# Altium PCB PCB1规则OK.PcbDoc
Units mil, origin at the board's own origin, x right, y up, seen from the top; angles counter-clockwise.
Board outline 5905.51 x 5905.51 mil, 2 copper layers (Top Layer, Bottom Layer); 93 components, 93 nets, 298 pads, 41 vias.
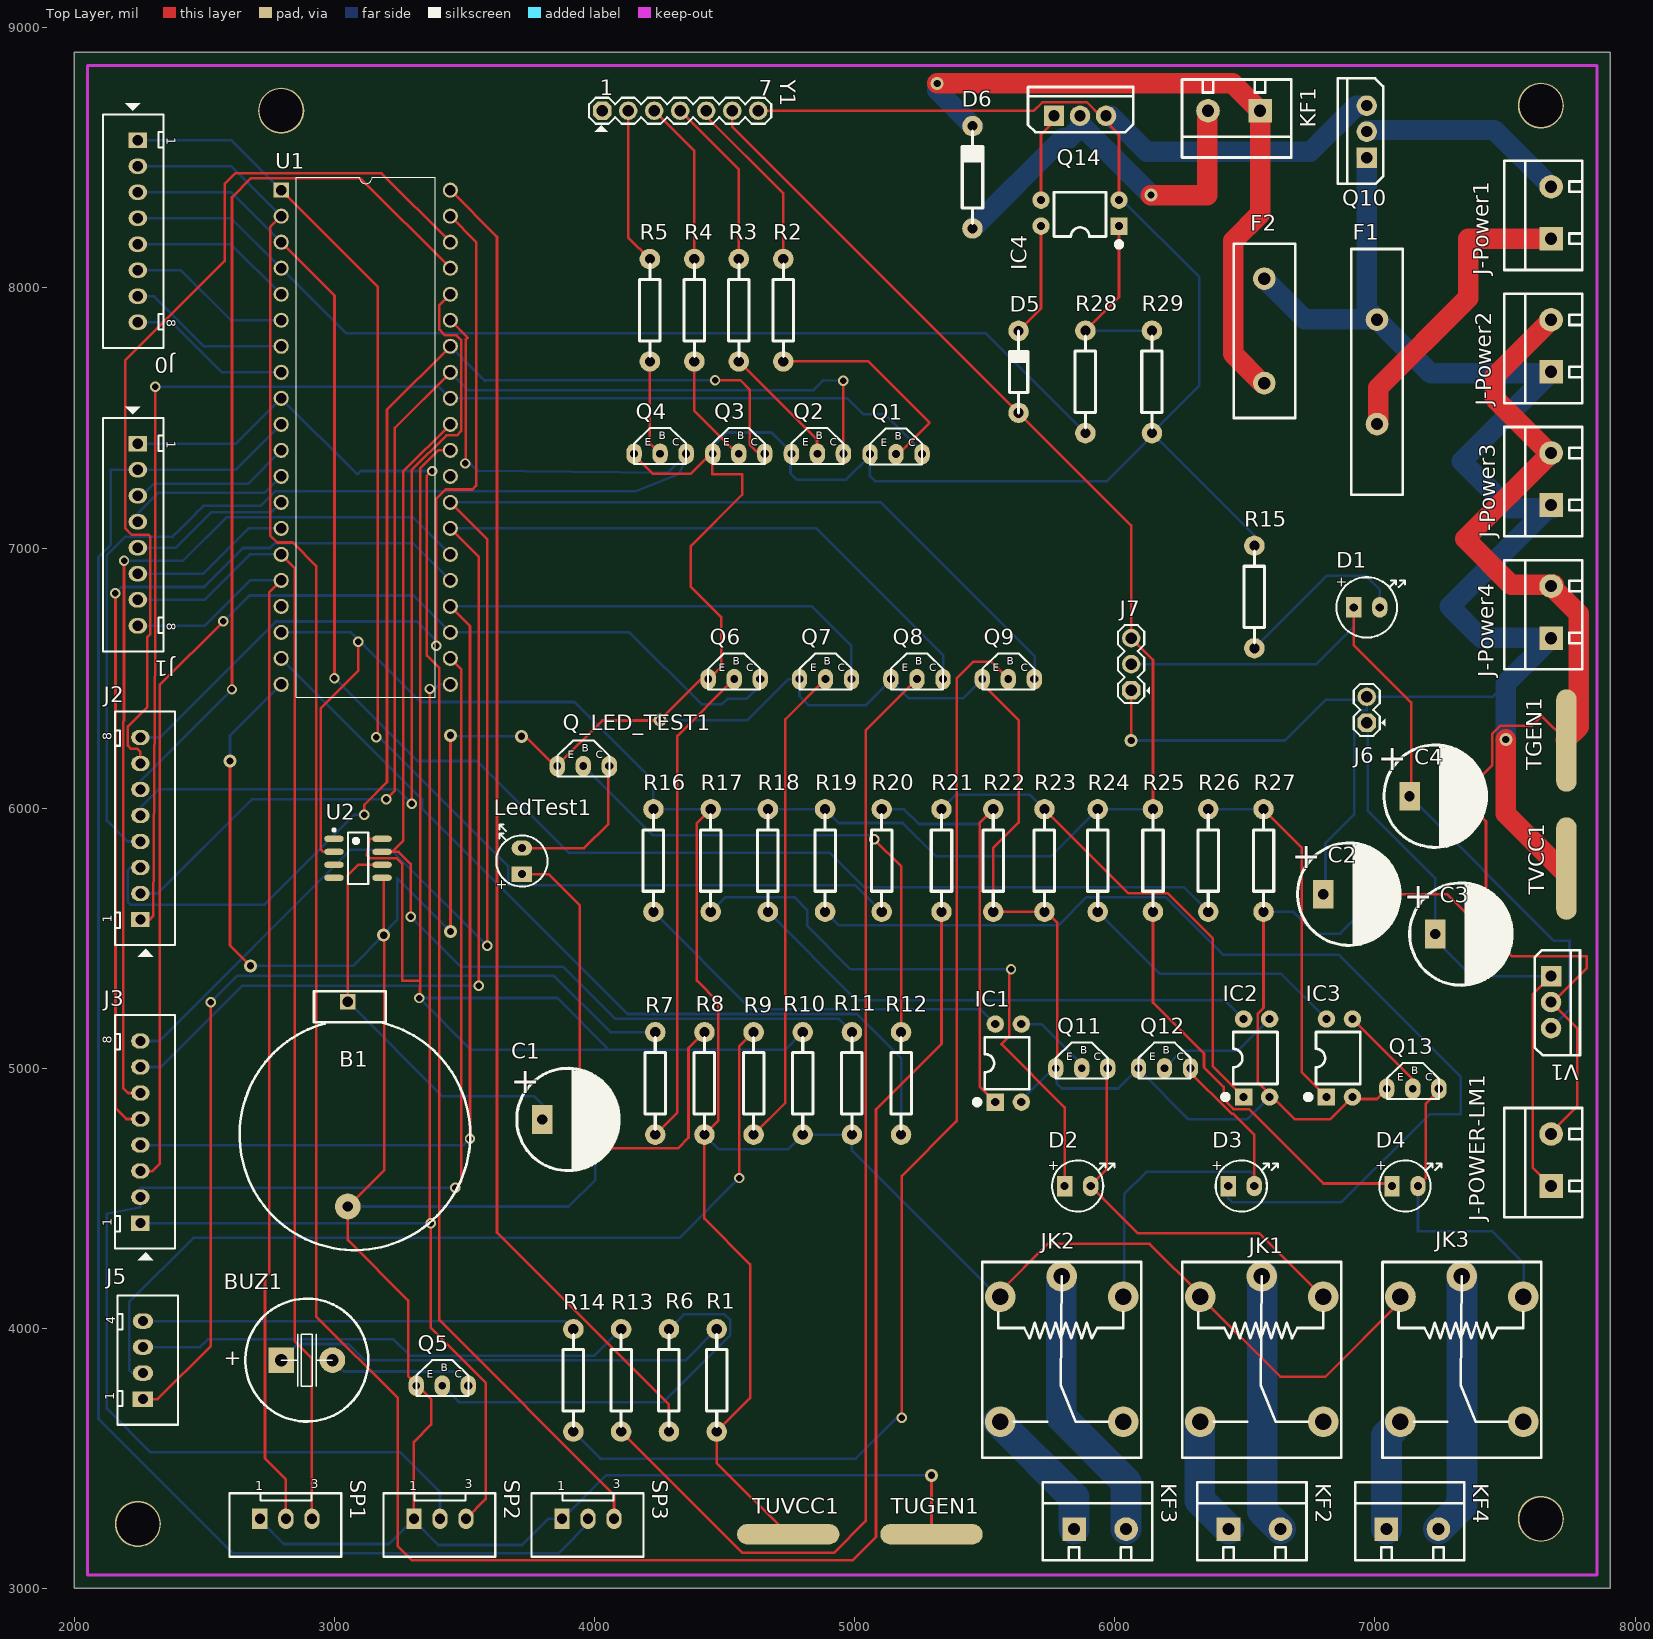
[diagram p0: Top Layer view]
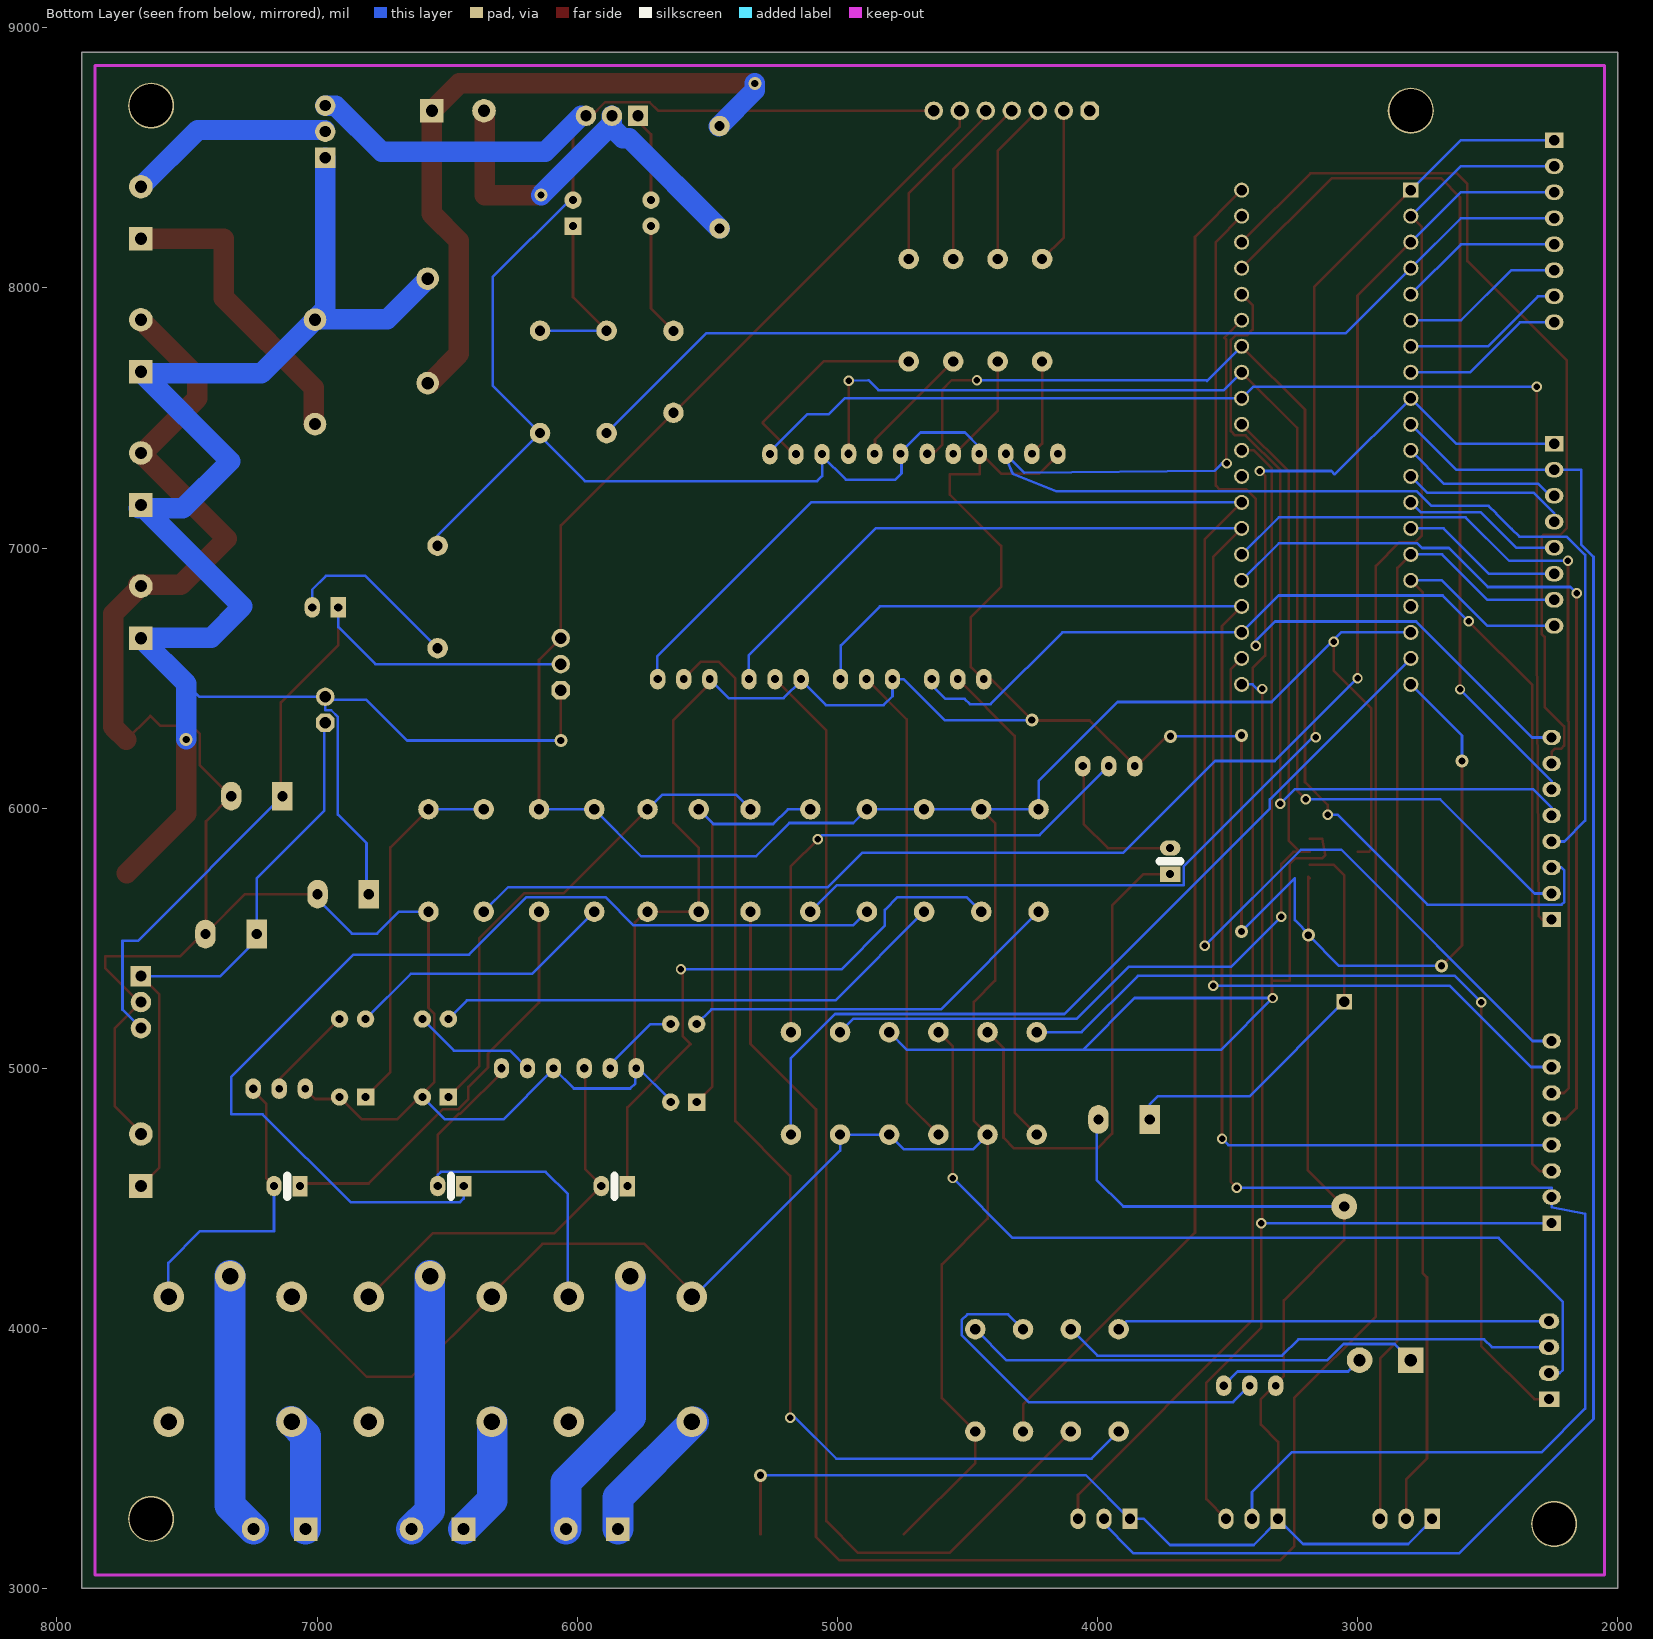
[diagram p1: Bottom Layer view, seen from below]

## Layer stack, top to bottom
Top Solder: solder mask 0.4, Solder Resist, Dk 3.5
Top Layer: signal copper 1.4
Dielectric 1: dielectric 12.6, FR-4, Dk 4.8
Bottom Layer: signal copper 1.4
Bottom Solder: solder mask 0.4, Solder Resist, Dk 3.5

## Board outline
2000,3000 7905.51,3000 7905.51,8905.51 2000,8905.51

## Design rules (kind name [scope] priority, off if disabled: settings)
Clearance [All] p1: gap=7.87
Height [All] p1: minheight=0 maxheight=2181.1 prefheight=500
HoleSize [All] p1: absolutevalues=TRUE maxlimit=100 minlimit=15.75 maxpercent=80.000 minpercent=20.000
HoleToHoleClearance [All] p1: gap=39.37 allowstackedmicrovias=TRUE
PolygonConnect [All] p1: connectstyle=Relief reliefconductorwidth=10 reliefentries=4 polygonreliefangle="90 Angle" airgapwidth=10
RoutingVias [All] p1: holewidth=25 width=40 viastyle="Through Hole" minholewidth=28 minwidth=50 maxholewidth=28 maxwidth=50
SMDNeckDown [All] p1: percent=50.000
SilkToSilkClearance [All] p1: silktosilkclearance=0
SilkToSolderMaskClearance [IsPad] p1: minsilkscreentomaskgap=0 clearancetoexposedcopper=TRUE
SolderMaskExpansion [All] p1: expansion=4
Width [All] p1: maxlimit=118.11 minlimit=10 preferedwidth=10 minimp=50.000000 maximp=50.000000 favimp=50.000000
25 further rules are at their usual default settings.

## Classes and differential pairs
net class P3BUS[0..7]: P3BUS0 P3BUS1 P3BUS2 P3BUS3 P3BUS4 P3BUS5 P3BUS6 P3BUS7
net class P2BUS[0..7]: P2BUS0 P2BUS1 P2BUS2 P2BUS3 P2BUS4 P2BUS5 P2BUS6 P2BUS7
net class P1BUS[0..7]: P1BUS0 P1BUS1 P1BUS2 P1BUS3 P1BUS4 P1BUS5 P1BUS6 P1BUS7
net class P0BUS[0..7]: P0BUS0 P0BUS1 P0BUS2 P0BUS3 P0BUS4 P0BUS5 P0BUS6 P0BUS7
component class U_电源: C2 C3 C4 D1 F1 J6 J7 J-Power1 J-Power2 J-Power3 J-Power4 J-POWER-LM1 Q10 R15 TGEN1 TVCC1 V1
component class U_电机控制盒: D5 D6 F2 IC4 KF1 Q14 R28 R29
component class U_功率开关: D2 D3 D4 IC1 IC2 IC3 JK1 JK2 JK3 KF2 KF3 KF4 Q11 Q12 Q13 R16 R17 R18 R19 R20 R21 R22 R23 R24 R25 R26 R27
component class U_STC15_U1: B1 BUZ1 C1 J0 J1 J2 J3 J5 LedTest1 Q1 Q2 Q3 Q4 Q5 Q6 Q7 Q8 Q9 Q_LED_TEST1 R1 R2 R3 R4 R5 R6 R7 R8 R9 R10 R11 R12 R13 R14 SP1 SP2 SP3 TUGEN1 TUVCC1 U1 U2 Y1

## Components (designator, comment, footprint, x,y, rotation, side; value= is the part's Value field where it differs from the comment)
B1 "CR2032" CR2032座 3078.74,4744.09 r90 top
BUZ1 "SD1209T5-A1" BUZ5-12-0R5-9MM 2893.7,3877.95 r0 top
C1 "104" CE5-6R5X5-1mm 3897.64,4803.15 r0 top
C2 "0.1uf" CE5-6R5X5-1mm 6899.61,5669.29 r0 top
C3 "0.33uf" CE5-6R5X5-1mm 7330.57,5516 r0 top
C4 "0.1uf" CE5-6R5X5-1mm 7231.57,6046 r0 top
D1 "333-2SYGD/S530-E2" LED2-D5R9X8R7 6968.5,6771.65 r0 top
D2 "C535A WJN CU0V0231" LED2-D5X5 5857.09,4547.24 r0 top
D3 "C535A WJN CU0V0231" LED2-D5X5 6486.22,4547.24 r0 top
D4 "C535A WJN CU0V0231" LED2-D5X5 7115.35,4547.24 r0 top
D5 "1N457" DO-35 5629.92,7519.69 r90 top
D6 "1N4007-E3/73" DO-41 5452.76,8228.35 r90 top
F1 "FUSE" FUSE-24R1X3RX29R7-TH 7007.87,7677.17 r90 top
F2 "R30-600" FUSE-16R5X3RX24R9-TH 6574.8,7834.65 r90 top
IC1 "817" DIP4-300 5590.55,5019.69 r90 top
IC2 "817" DIP4-300 6545.22,5039.37 r90 top
IC3 "817" DIP4-300 6863.45,5039.37 r90 top
IC4 "817" DIP4-300 5866.14,8287.4 r180 top
J0 "W7810811120AB" XH8P-2R54-TH 2244.09,8217.72 r270 top
J1 "W7810811120AB" XH8P-2R54-TH 2244.09,7050.77 r270 top
J2 "W7810811120AB" XH8P-2R54-TH 2253.93,5921.67 r90 top
J3 "W7810811120AB" XH8P-2R54-TH 2253.93,4754.72 r90 top
J5 "W7810411120AB" XH4P-2R54-TH 2263.78,3877.95 r90 top
J6 "PAS1251-0201A01B1BA" CON2P-2R54-TH 6968.5,6377.95 r90 top
J7 "PAS1251-0301A01B1BA" CON3P-2R54-TH 6062.99,6553.54 r90 top
J-Power1 "KF301-5.08-2p" KF301-5.0-2P 7677.17,8388.98 r90 top
J-Power2 "KF301-5.08-2p" KF301-5.0-2P 7677.17,7877.17 r90 top
J-Power3 "KF301-5.08-2p" KF301-5.0-2P 7677.17,7365.35 r90 top
J-Power4 "KF301-5.08-2p" KF301-5.0-2P 7677.17,6853.54 r90 top
J-POWER-LM1 "KF301-5.08-2p" KF301-5.0-2P 7677.17,4747.24 r90 top
JK1 "SRD-05VDC-SL-C" SRD-C_B 6801.22,4121.31 r270 top
JK2 "SRD-05VDC-SL-C" SRD-C_B 6032,4121.31 r270 top
JK3 "SRD-05VDC-SL-C" SRD-C_B 7570.44,4121.31 r270 top
KF1 "KF301-5.08-2p" KF301-5.0-2P 6358.27,8681.1 r180 top
KF2 "KF301-5.08-2p" KF301-5.0-2P 6637.01,3228.35 r0 top
KF3 "KF301-5.08-2p" KF301-5.0-2P 6043.31,3228.35 r0 top
KF4 "KF301-5.08-2p" KF301-5.0-2P 7244.09,3228.35 r0 top
LedTest1 "333-2SUBD/S400-A4" LED2-D5X5 3720.47,5796.46 r90 top
Q1 "2N3904" TO-92-3-EBC 5159,7361 r0 top
Q2 "2N3904" TO-92-3-EBC 4856.66,7362.2 r0 top
Q3 "2N3904" TO-92-3-EBC 4554.31,7362.2 r0 top
Q4 "2N3904" TO-92-3-EBC 4251.97,7362.2 r0 top
Q5 "2N3904" TO-92-3-EBC 3414.57,3779.53 r0 top
Q6 "2N3904" TO-92-3-EBC 4536.61,6496.06 r0 top
Q7 "2N3904" TO-92-3-EBC 4887.93,6496.06 r0 top
Q8 "2N3904" TO-92-3-EBC 5239.24,6496.06 r0 top
Q9 "2N3904" TO-92-3-EBC 5590.55,6496.06 r0 top
Q10 "IRF540" TO220A 6968.5,8600.79 r90 top
Q11 "2N3904" TO-92-3-EBC 5872.77,5000 r0 top
Q12 "2N3904" TO-92-3-EBC 6191,5000 r0 top
Q13 "2N3904" TO-92-3-EBC 7145.67,4921.26 r0 top
Q14 "IRFZ44" TO220A 5866.14,8661.42 r0 top
Q_LED_TEST1 "2N3904" TO-92-3-EBC 3956.69,6161.42 r0 top
R1 "166" RY0R25W 4468.5,3799.21 r90 top
R2 "100R" RY0R25W 4724.41,7913.39 r90 top
R3 "100R" RY0R25W 4553.45,7913.39 r90 top
R4 "100R" RY0R25W 4382.49,7913.39 r90 top
R5 "100R" RY0R25W 4211.54,7913.39 r90 top
R6 "1K" RY0R25W 4284.78,3799.21 r90 top
R7 "5.1K" RY0R25W 4232.28,4940.94 r90 top
R8 "250" RY0R25W 4421.26,4940.94 r90 top
R9 "5.1K" RY0R25W 4610.24,4940.94 r90 top
R10 "1.2k" RY0R25W 4799.21,4940.94 r90 top
R11 "1.2k" RY0R25W 4988.19,4940.94 r90 top
R12 "1.2k" RY0R25W 5177.16,4940.94 r90 top
R13 "5.1K" RY0R25W 4101.05,3799.21 r90 top
R14 "5.1K" RY0R25W 3917.32,3799.21 r90 top
R15 "250" RY0R25W 6535.43,6811.02 r90 top
R16 "1.2K" RY0R25W 4225.16,5797.8 r90 top
R17 "300" RY0R25W 4445.16,5797.8 r90 top
R18 "1.2K" RY0R25W 4665.16,5797.8 r90 top
R19 "300" RY0R25W 4885.16,5797.8 r90 top
R20 "1K" RY0R25W 5102.64,5797.8 r90 top
R21 "1K" RY0R25W 5332.64,5797.8 r90 top
R22 "400" RY0R25W 5531.5,5797.8 r90 top
R23 "400" RY0R25W 5728.35,5797.8 r90 top
R24 "1.2K" RY0R25W 5933.17,5797.8 r90 top
R25 "300" RY0R25W 6145.67,5797.8 r90 top
R26 "1K" RY0R25W 6358.17,5797.8 r90 top
R27 "400" RY0R25W 6570.67,5797.8 r90 top
R28 "1k" RY0R25W 5885.83,7637.8 r90 top
R29 "400" RY0R25W 6141.73,7637.8 r90 top
SP1 "" XH3P-2R54-TH 2813.39,3267.72 r0 top
SP2 "" XH3P-2R54-TH 3405.51,3267.72 r0 top
SP3 "" XH3P-2R54-TH 3974.8,3267.72 r0 top
TGEN1 "T？" 铺铜条#1 7776.22,5844.84 r90 top
TUGEN1 "T？" 铺铜条#2 5335.28,2793.66 r90 top
TUVCC1 "T？" 铺铜条#2 4784.09,2793.66 r90 top
TVCC1 "T？" 铺铜条#1 7776.22,5352.72 r90 top
U1 "STC15F2K60S2_PDIP40" DIP40 2795.28,8375.59 r0 top
U2 "DS3231MZ+" S8MK+1_L 3090.55,5807.09 r0 top
V1 "7805" TO220A 7677.17,5254.33 r270 top
Y1 "315接收模块" CON7P-2R54-TH 4329.13,8681.1 r0 top

## Footprints (in the part's own frame and the unit in brackets; to place one, negate y for a bottom-side part, rotate by r counter-clockwise, add the part's x,y. Pads: shape width x height; smd on the part's side, far side on the other; paste and mask are expansions set on the pad)
BUZ5-12-0R5-9MM [mm]
  rect 2.5x2.5 hole 1.2: 1(-2.5,0)
  round 2.5 hole 1.2: 2(2.5,0)
  silkscreen extent -6,-6 6,6, body extent -5.99,-6 6,6, height 9
CE5-6R5X5-1mm [mm]
  rect 2x2.8 hole 1: 1(-2.5,0)
  oval 2x2.8 hole 1: 2(2.5,0)
  silkscreen extent -5,-5 5,5, body extent -4.99,-4.9 5,5.1, height 10
CON2P-2R54-TH [mm]
  oct 1.8x1.8 hole 1.1: 1(-1.27,0)
  round 1.8 hole 1.1: 2(1.27,0)
  silkscreen extent -2.54,-1.8 2.54,1.27, body extent -2.54,-1.27 2.54,1.27, height 9.39
CON3P-2R54-TH [mm]
  oct 1.8x1.8 hole 1.1: 1(-2.54,0)
  round 1.8 hole 1.1: 2(0,0) 3(2.54,0)
  silkscreen extent -3.81,-1.83 3.81,1.27, body extent -3.78,-1.27 3.84,1.27, height 1.53
CON7P-2R54-TH [mm]
  oct 1.8x1.8 hole 1.1: 1(-7.62,0)
  round 1.8 hole 1.1: 2(-5.08,0) 3(-2.54,0) 4(0,0) 5(2.54,0) 6(5.08,0) 7(7.62,0)
  silkscreen extent -8.89,-2.04 8.89,1.27, body extent -8.86,-1.27 8.92,1.27, height 8.97
CR2032座 [mm]
  rect 1.524x1.524 hole 1: 0(13,0.7)
  round 2.524 hole 1: 1(-7,0.7)
  silkscreen extent -11.26,-11.26 14,11.26
DIP4-300 [mm] "4.6*7.6*3.8(长宽高）"
  rect 1.7x1.7 hole 0.8: 1(-3.81,1.27)
  round 1.7 hole 0.8: 2(-3.81,-1.27) 3(3.81,-1.27) 4(3.81,1.27)
  silkscreen extent -4.06,-2.03 2.54,3.3, body extent -3.93,-2.29 3.94,2.29, height 4.5
DIP40 [mil]
  rect 58x58 hole 40: 1(0,0)
  round 58 hole 40: 2(0,-100) 3(0,-200) 4(0,-300) 5(0,-400) 6(0,-500) 7(0,-600) 8(0,-700) 9(0,-800) 10(0,-900) 11(0,-1000) 12(0,-1100) 13(0,-1200) 14(0,-1300) 15(0,-1400) 16(0,-1500) 17(0,-1600) 18(0,-1700) 19(0,-1800) 20(0,-1900) 21(650,-1900) 22(650,-1800) 23(650,-1700) 24(650,-1600) 25(650,-1500) 26(650,-1400) 27(650,-1300) 28(650,-1200) 29(650,-1100) 30(650,-1000) 31(650,-900) 32(650,-800) 33(650,-700) 34(650,-600) 35(650,-500) 36(650,-400) 37(650,-300) 38(650,-200) 39(650,-100) 40(650,0)
  silkscreen extent 58,-1950 592,50
DO-35 [mm]
  round 2 hole 1: 1(0,0) 2(8,0)
  silkscreen extent 0,-0.9 8,0.9, body extent -0.3,-0.97 8.3,1.02, height 1.99
DO-41 [mm]
  round 2 hole 1: 1(0,0) 2(10,0)
  silkscreen extent 0.5,-1 9.5,1, body extent -0.53,-1.3 10.53,1.3, height 2.8
FUSE-16R5X3RX24R9-TH [mm]
  round 2.2 hole 1.2: 1(-5.1,0) 2(5.1,0)
  silkscreen extent -8.5,-3 8.5,3, body extent -10.12,-1.8 11.18,1.3, height 25.65
FUSE-24R1X3RX29R7-TH [mm]
  round 2.2 hole 1.2: 1(-5.1,0) 2(5.1,0)
  silkscreen extent -12,-2.5 12,2.5, body extent -10.76,-1.45 10.54,1.65, height 25.65
KF301-5.0-2P [mm] "可拼接端子/6A"
  rect 2.3x2.3 hole 1.2: 1(-5.08,0)
  round 2.3 hole 1.2: 2(0,0)
  silkscreen extent -8.13,-3.05 2.54,4.57, body extent -7.95,-3 2.55,4.6, height 10.05
LED2-D5R9X8R7 [mm]
  rect 1.5x2 hole 0.8: 1(-1.27,0)
  oval 1.5x2 hole 0.8: 2(1.27,0)
  silkscreen extent -2.95,-2.95 3.75,2.95, body extent -3,-3 2.88,2.89, height 8.7
LED2-D5X5 [mm]
  rect 1.5x2 hole 0.8: 1(-1.27,0)
  oval 1.5x2 hole 0.8: 2(1.27,0)
  silkscreen extent -2.5,-2.5 3.59,2.5, body extent -3,-3 2.98,2.99, height 14.5
RY0R25W [mm]
  round 2 hole 1: 1(-4.98,-0.027) 2(5.02,-0.027)
  silkscreen extent -4.48,-1.03 4.52,0.97, body extent -5.38,-1.11 5.38,1.2, height 2.43
S8MK+1_L [mm] "SOIC, 8-Leads, Body 4.9x3.9mm, Pitch 1.27mm, IPC High Density"
  oval 1.9x0.6 smd: 1(-2.35,1.905) 2(-2.35,0.635) 3(-2.35,-0.635) 4(-2.35,-1.905) 5(2.35,-1.905) 6(2.35,-0.635) 7(2.35,0.635) 8(2.35,1.905)
  silkscreen extent -2.47,-2.5 1,2.88, body extent -2,-2.5 2,2.5, height 1.75
SRD-C_B [mm] "单刀双投"
  round 3 hole 1.6: 1(0,0) 2(0,-12) 3(-2,-6) 4(12.2,0) 5(12.2,-12)
  silkscreen extent -3.4,-13.75 15.7,1.75, body extent -3.4,-13.75 15.7,1.75, height 15.6
TO220A [mm] "220，3脚晶体管"
  rect 2x2 hole 1.1: 1(-2.54,0)
  round 2 hole 1.1: 2(0,0) 3(2.54,0)
  silkscreen extent -5.08,-1.6 5.21,2.82, body extent -5.15,-1.53 5.15,2.9, height 18.5
TO-92-3-EBC [mm]
  oval 1.5x2 hole 0.762: B(0,0) E(-2.54,0)
  oval 1.5x2 hole 0.8: C(2.54,0)
  silkscreen extent -2.54,-1 2.54,2.5, body extent -3.1,-1.02 3.07,3.06, height 8.5
XH3P-2R54-TH [mm]
  rect 1.5x2 hole 1: 1(-2.54,0)
  oval 1.5x2 hole 1: 2(0,0) 3(2.54,0)
  silkscreen extent -5.5,-3.7 5.4,2.5, body extent -5.31,-3.6 5.29,2.4, height 7.5
XH4P-2R54-TH [mm]
  rect 1.5x2 hole 1: 1(-3.81,0)
  oval 1.5x2 hole 1: 2(-1.27,0) 3(1.27,0) 4(3.81,0)
  silkscreen extent -6.31,-3.4 6.29,2.5, body extent -6.47,-3.4 6.63,2.6, height 7.5
XH8P-2R54-TH [mm]
  rect 1.5x1.8 hole 1: 1(-8.89,0)
  oval 1.5x1.8 hole 1: 2(-6.35,0) 3(-3.81,0) 4(-1.27,0) 5(1.27,0) 6(3.81,0) 7(6.35,0) 8(8.89,0)
  silkscreen extent -12.5,-3.4 11.41,2.5, body extent -11.56,-3.6 11.54,2.4, height 7.5
铺铜条#1 [mil]
  oval 393.7x78.74 smd: 1(415,40)
铺铜条#2 [mil]
  oval 78.74x393.7 smd: 1(415,40)

## Part data
BUZ1: library part 102BA-00004OD.01, "DIP,12x9mm,额定电压DC5V,频率2048Hz,黑色,间距5mm"
C1 C2 C3 C4: library part 102CB-00002OD.01, "DIP,电容量681pf,额定电压2000V,偏差±10%,6.5X5mm"
D1: library part 102DL-00010CH.01, "DIP,封装/间距直径5/2.54mm,额定电压2V,亮度普亮,绿色"
D2 D3 D4: library part 102DL-00002DG.01, "DIP,封装/间距直径5/2.54mm,额定电压3.2V,亮度高亮,白色"
D5: library part 102DG-00002AI.01, "DIP,D0-35,额定电压70V,电流200mA"
D6: library part 102DG-00002BS.01, "DIP,DO-41,额定电压1000V,电流1A"
F1: library part 102FP-00037BI.01, "DIP,24.1x29.7x3.0mm,额定电压30V,额定电流9A,触发电流18A,中速断"
F2: library part 102FP-00034BI.01, "DIP,16.5x24.9x3.0mm,额定电压30V,额定电流6A,触发电流12A,中速断"
IC1 IC2 IC3 IC4: "线性光耦"
J0 J1 J2 J3: library part 102NB-00026CY.01, "DIP,座子,封装脚距2.54mm,180度,1x8PIN,塑高/针长7.0/3.40mm,白色"
J5: library part 102NB-00025CY.01, "DIP,座子,封装脚距2.54mm,180度,1x4PIN,塑高/针长7.0/3.40mm,白色"
J6: library part 102NL-00005DJ.01, "DIP,封装脚距2.54mm,180度,1x2PIN,上针/下针6.0/3.0mm,黑色"
J7: library part 102NL-00001DJ.01, "DIP,封装脚距2.54mm,180度,1x3PIN,黑色"
J-Power1 J-Power2 J-Power3 J-Power4 J-POWER-LM1 KF1 KF2 KF3 KF4: library part KF301
JK1 JK2 JK3: "5V一组转换"
LedTest1: library part 102DL-00029CH.01, "DIP,封装/间距直径5/2.54mm,额定电压3.3V,亮度高亮,蓝色"
Q1 Q2 Q3 Q4 Q5 Q6 Q7 Q8 Q9 Q11 Q12 Q13 Q_LED_TEST1: library part 102GN-00009BA.01, "DIP,封装形式TO-92-3,耐压值40V,额定电流200mA,耗散功率625mW"
Q10 Q14: library part IRF840, "N沟场效应管"
R1 R6: library part 102RO-00079BW.01, "DIP,阻值1K,精度±5%,9.0x3.3mm,额定功率1/2W"
R2 R3 R4 R5: library part 102RO-00040BS.01, "DIP,阻值100R,精度±1%,6.1x2.29mm,额定功率1/4W"
R7 R9 R13 R14: library part 102RO-00048BS.01, "DIP,阻值5.1K,精度±1%,6.2x2.29mm,额定功率1/4W"
R8 R10 R11 R12: library part 102RO-00036BS.01, "DIP,阻值8.2R,精度±1%,AXIAL0.4,额定功率1/2W"
R15: library part 102RO-00087BS.01, "DIP,阻值500R,精度±0.1%,4.75x1.65mm,额定功率1/4W"
R16 R17 R18 R19 R20 R21 R22 R23 R24 R25 R26 R27: library part 102RO-00085BW.01, "DIP,阻值1K,精度±0.1%,AXIAL0.4,额定功率1/4W"
R28 R29: library part 102RO-00018BW.01, "DIP,阻值1M,精度±1%,AXIAL0.4,额定功率1/4W"
SP1 SP2 SP3: library part 102NB-00017CY.01, "DIP,座子,封装脚距2.54mm,180度,1x3PIN,塑高/针长7.0/3.40mm,白色"
TGEN1 TUGEN1 TUVCC1 TVCC1: library part 铺铜条, "2mm*20的铜条用于焊接"
U2: "+/-5ppm, MEMS based Real-Time Clock, I2C Interface, 8-Pin SO, -40 to 85 degC, Pb-Free"
V1: library part 78xx, "线性稳压芯片"
Y1: library part 102NL-00032BV.01, "DIP,封装脚距2.54mm,180度,1x7PIN,黑色"

## Free pads (board coordinates)
  round 177.17 hole 165.35 unplated: 0(2244.09,3248.03) 1(2795.28,8681.1) 2(7637.8,8700.79) 3(7637.8,3267.72)

## Via types
v1: diameter 40, hole 25, Top Layer to Bottom Layer, 29 vias
v2: diameter 50, hole 28, Top Layer to Bottom Layer, 12 vias

## Nets (pads, with @x,y where several pads share a name; then routed paths per layer and width w, separated by ;. In a path a pad name is that pad's centre, name@x,y a point inside that pad or via, vN(x,y) a via of type N, cw(c..) or ccw(c..) an arc to the next point about the centre after c; other vN are vias at no path point)
CLOCK_CLO: R10.2 U1.30 U2.8 | length 5426.8
  Top Layer w10: U2.8 3136.09,5882.09 3124,5820 3137,5807 3240,5807 3260.13,5786.87 3260.13,5335.87 3330.37,5335.87 ; U1.30 3398.59,7375.59 3330.37,7307.37 3330.37,5335.87 ; 3330.37,5335.87 3330.37,5274.37 v1(3326,5270) 3330.37,5335.87
  Bottom Layer w10: R10.2 4732.69,5071 4056,5071 ; 4056,5071 3525,5071 v1(3326,5270) 3857,5270 4056,5071
CLOCK_IO: R11.2 U1.31 U2.7 | length 3947.8
  Top Layer w10: U2.7 3222.09,5832.09 ; v1(3293,5583) 3293,5785.09 3246,5832.09 3222.09,5832.09 ; U1.31 3264.13,7294.44 3264.13,5874.13 3222.09,5832.09
  Bottom Layer w10: v1(3293,5583) 3486,5390 3880,5390 4079.17,5190.83 4937.01,5190.83 R11.2
GND: B1.1 C1.2 C2.2 C3.2 C4.2 IC1.2 IC2.2 IC3.2 IC4.2 J-Power2.2 J-Power3.2 J-Power4.2 J-POWER-LM1.2 Q1.E Q2.E Q3.E Q4.E Q5.E Q6.E Q7.E Q8.E Q9.E Q10.3 Q11.E Q12.E Q13.E Q14.3 Q_LED_TEST1.E R15.2 R22.1 R23.1 R27.1 R29.1 SP1.1 SP2.1 SP3.1 TGEN1.1 TUGEN1.1 U1.20 U2.5 V1.2 Y1.7 | length 30643.7
  Top Layer w10: v2(2598.43,6181.1) 2598.43,5472.44 v2(2677.17,5393.7) ; U2.5@3184,5731 3188.98,5735.98 v2(3188.98,5511.81) ; v2@3192,5512 3192,4609.32 B1.1 3051.18,4339.82 3283,4108 3283,3817 3372,3728 3372,3630 3305.51,3563.51 SP2.1 ; v2(3446,5526) v2(3446,6280) ; v2(3719,6276) 3726.5,6283.5 3848.58,6161.42 3854.42,6161.42 4030,6337 v2@4251,6337 ; Q4.E@4174.38,7334.62 4224,7285 4369,7285 Q3.E@4440.1,7356.1 ; v2(4251.97,6338.58) 4409.45,6496.06 Q6.E ; Q3.E@4434,7362.2 Q3.E@4440.1,7356.1 ; Q6.E@4440,6496 4486.61,6542.61 4486.61,6733.86 4370.08,6850.39 4370.08,7007.87 4566.93,7204.72 4566.93,7283.46 4453,7283.46 4453,7343.2 4444.16,7352.05 Q3.E@4440.1,7356.1 ; Q3.E@4460,7362 4446,7362 Q3.E@4440.1,7356.1 ; Y1.7 5688.88,8681.1 5721.44,8713.66 5892.64,8713.66 Q14.3@5944.88,8661.42 ; TUGEN1.1 v2(5295.28,3435.28) ; Q9.E@5494,6496.06 5494,6474.5 5629.92,6338.58 5629.92,5944.88 5532.56,5847.52 R22.1 ; R22.1@5551.18,5590.55 5562.36,5601.73 R23.1 ; R23.1@5748.03,5590.55 5778,5560.58 Q11.E@5778,5000 ; Q14.3@5984.25,8661.42 5984.25,8622.05 6016.14,8590.16 IC4.2 ; R27.1 6571.73,5231.41 6548.88,5208.56 6548.88,4947.18 6692.91,4803.15 6827.23,4803.15 IC3.2 ; IC3.2@6929.13,4881.89 7007.89,4881.89 Q13.E@7046.5,4920.5 ; C2.2 7276.71,5669.29 C3.2@7427,5519 ; C4.2@7324,6053 7339.06,6053 7450.76,6164.69 7450.76,6285.64 7481.36,6316.24 7602.31,6316.24 7641.06,6355 TGEN1.1 ; C4.2 7427,5949 C3.2@7427,5519 ; C3.2@7427,5514 C3.2@7427,5519 ; C3.2@7430,5516 C3.2@7427,5519 ; C3.2@7439,5518 7527,5430 7815,5430 7815,5386 V1.2@7680.25,5251.25 ; V1.2 V1.2@7680.25,5251.25 ; J-POWER-LM1.2@7685,4761 7778,4854 7778,5153.5 V1.2@7680.25,5251.25
  Top Layer w78.74: J-Power4.2 7783,6747.71 7783,6312 TGEN1.1@7734,6263 ; J-Power3.2 J-Power3.2@7673.41,7361.59 ; J-Power2.2 7460,7660 7460,7575 J-Power3.2@7673.41,7361.59 ; J-Power4.2@7688,6858 7524.19,6858 7347,7035.19 J-Power3.2@7673.41,7361.59
  Bottom Layer w10: v2(2598.43,6181.1) 2598.43,6278.74 U1.20 ; v2(2677.17,5393.7) 3070.87,5393.7 v2(3188.98,5511.81) ; SP1.1@2719,3257 2805,3171 3208.8,3171 SP2.1 ; B1.1 3900.5,4468.5 4003,4571 C1.2@4003,4792 ; v2@3182,5511 3241,5570 3241,5731 v2(3446,5526) ; SP2.1@3305,3261 3399,3167 3721,3167 3821.72,3267.72 SP3.1 ; v2(3446,6280) 3442,6276 v2(3719,6276) ; SP3.1@3875,3266 4044.28,3435.28 v2(5295.28,3435.28) ; v2(4251.97,6338.58) 4587.58,6338.58 4745.06,6496.06 Q7.E@4785.94,6496.06 ; Q3.E@4452.38,7387.38 4509,7444 4680,7444 4753.15,7370.85 4753.15,7286.85 4777,7263 4967,7263 Q1.E@5058,7354 ; Q7.E 4787.93,6430.07 4822,6396 5044,6396 Q8.E@5138.5,6490.5 ; Q1.E@5058,7362 Q1.E@5058,7354 ; Q8.E@5135,6494 Q8.E@5138.5,6490.5 ; Q8.E@5147,6499 Q8.E@5138.5,6490.5 ; Q9.E 5417.49,6423 5206,6423 Q8.E@5138.5,6490.5 ; IC1.2@5629.92,4881.89 5645.89,4881.89 Q11.E@5764,5000 ; Q11.E@5776,4995 5776,4942 5796,4922 6013,4922 Q12.E ; IC4.2@6024,8342 6325,8041 6325,7623.94 R29.1 R29.1@6148.76,7435.76 ; Q12.E@6102.36,5000 6102.36,4984.64 6283.85,4803.15 6509,4803.15 IC2.2 ; R29.1@6156,7443 R29.1@6148.76,7435.76 ; R15.2@6535,7004 6535,7049.53 R29.1@6148.76,7435.76 ; R27.1 6684.73,5601.73 6769,5517.46 6866.46,5517.46 C2.2@7003,5654 ; Q1.E@5058,7354 5058,7277 5078,7257 5970,7257 R29.1@6148.76,7435.76
  Bottom Layer w78.74: Q14.3@5984,8662 6123,8523 6752,8523 6929,8700 6967.72,8700 Q10.3
NetB1_0: B1.0 C1.1 U2.6 | length 1603.6
  Top Layer w10: B1.0 3051.18,5742.27 3091,5782.09 U2.6
  Bottom Layer w10: B1.0 3414.09,4893 3766.21,4893 3799.21,4860 C1.1
NetBUZ1_1: BUZ1.1 R1.2 | length 1775.8
  Bottom Layer w10: BUZ1.1 2857.36,3940.04 3054,3940.04 3117.04,3877 4349.72,3877 R1.2
NetBUZ1_2: BUZ1.2 Q5.C | length 528.1
  Bottom Layer w10: BUZ1.2 3036.08,3834 3461,3834 Q5.C@3490.02,3804.98
NetC3_1: C3.1 J6.1 J-POWER-LM1.1 V1.1 | length 2244
  Top Layer w10: J-POWER-LM1.1 7606,4618.41 7606,5283.16 V1.1
  Bottom Layer w10: J6.1@6972,6314 6972,5990 7232.15,5729.85 C3.1 ; C3.1@7253.94,5472.44 7372.05,5354.33 V1.1
NetD1_2: D1.2 R15.1 | length 687.5
  Bottom Layer w10: R15.1 6814.54,6893 6965.5,6893 7018.5,6840 D1.2
NetD2_1: D2.1 R17.1 | length 2279.2
  Top Layer w10: v1(5601,5381) 5594.21,5374.21 5594.21,5123.21 5563.5,5092.5 5807.09,4848.91 D2.1
  Bottom Layer w10: R17.1 4502.49,5658 4768,5658 4817,5609 4817,5548 4984.5,5380.5 4985,5381 v1(5601,5381)
NetD2_2: D2.2 JK1.1 Q11.C | length 1555.2
  Top Layer w10: D2.2@5907,4550 5969,4612 Q11.C@5969,5003 ; D2.2 6089.33,4365 6556,4365 JK1.1@6805,4116
NetD3_1: D3.1 R19.1 | length 4028.9
  Bottom Layer w10: R19.1 4938.95,5549 5783,5549 5892,5658 6194,5658 6415,5437 6860,5437 7330,4967 7330,4823 7209,4823 6871,4485 6450,4485 6436.22,4498.78 D3.1
NetD3_2: D3.2 JK2.1 Q12.C | length 1537.6
  Top Layer w10: Q12.C@6282,5007 6282,4992.18 6449.02,4825.16 6454.84,4825.16 6536.22,4743.78 D3.2
  Bottom Layer w10: JK2.1@6036,4131 6036,4517 6121,4602 6524.22,4602 6536.22,4590 D3.2
NetD4_1: D4.1 R25.1 | length 1624.1
  Top Layer w10: R25.1 6146.73,5252.27 6343,5056 6343,5003 6418,4928 6418,4881.46 6456.42,4843.03 6515.97,4843.03 6802,4557 7065.35,4557 D4.1
NetD4_2: D4.2 JK3.1 Q13.C | length 1149.8
  Top Layer w10: D4.2 7195,4576.89 7195,4863 Q13.C@7246,4914
  Bottom Layer w10: D4.2 7165.35,4373.65 7450.35,4373.65 7572,4252 JK3.1@7572,4133
NetD5_2: D5.2 IC4.4 | length 438.5
  Top Layer w10: D5.2 5716.14,7920.87 IC4.4
NetD6_1: D6.1 KF1.2 Q14.2 | length 1575.1
  Top Layer w78.74: v2(6139,8357) 6356,8357 6356,8674 KF1.2@6358,8676
  Bottom Layer w78.74: D6.1 5799.21,8574.8 5825.08,8574.8 5868,8617.72 Q14.2@5868,8628 ; Q14.2 5866.14,8629.86 Q14.2@5868,8628 ; Q14.2@5868,8662 Q14.2@5868,8628 ; v2(6139,8357) Q14.2@5868,8628
NetD6_2: D6.2 F2.1 KF1.1 | length 2645
  Top Layer w78.74: v2(5317,8786) 6453.37,8786 KF1.1 6558.27,8284.27 6455,8181 6455,7746 F2.1@6569,7632
  Bottom Layer w78.74: v2(5317,8786) 5317,8760 D6.2@5455,8622
NetF1_1: F1.1 J-Power1.1 | length 1176.1
  Top Layer w78.74: F1.1@7013,7475 7013,7616 7357.98,7960.98 7357.98,8188.98 J-Power1.1
NetIC1_1: IC1.1 R20.2 R22.2 | length 1648.2
  Top Layer w10: R22.2 5480,5942.87 5480,4930.24 IC1.1
  Bottom Layer w10: R20.2 5190,5995.43 5246.43,5939 5476.13,5939 R22.2
NetIC1_3: IC1.3 Q11.B | length 299.8
  Bottom Layer w10: IC1.3 5717.31,5169.69 Q11.B@5875,5012
NetIC1_4: IC1.4 R16.1 | length 1493.3
  Bottom Layer w10: R16.1 4601.37,5226.58 5483.66,5226.58 IC1.4
NetIC2_1: IC2.1 R21.2 R23.2 | length 1954.4
  Top Layer w10: R23.2 6052.84,5672 6204,5672 6376,5500 6376,5008.59 IC2.1
  Bottom Layer w10: R21.2 5390.27,6052 5672.84,6052 R23.2
NetIC2_3: IC2.3 Q12.B | length 482.7
  Bottom Layer w10: Q12.B 6259,5068 6473.85,5068 IC2.3
NetIC2_4: IC2.4 R18.1 | length 1999.8
  Bottom Layer w10: R18.1 5006.95,5261 6423.59,5261 IC2.4
NetIC3_1: IC3.1 R26.2 R27.2 | length 1418.7
  Top Layer w10: R27.2 6718,5849.17 6718,4984.82 IC3.1
  Bottom Layer w10: R26.2 R27.2
NetIC3_3: IC3.3 Q13.B | length 364.3
  Top Layer w10: IC3.3 7145.67,4957.15 Q13.B
NetIC3_4: IC3.4 R24.1 | length 1050
  Bottom Layer w10: R24.1 6172.96,5363 6639.82,5363 IC3.4
NetIC4_1: IC4.1 R28.2 R29.2 | length 711.4
  Top Layer w10: R28.2 6016.14,7964.69 IC4.1
  Bottom Layer w10: R28.2 R29.2
NetIC4_3: IC4.3 Q14.1 | length 353.5
  Top Layer w10: IC4.3 5716.14,8590.16 Q14.1@5787.4,8661.42
NetJ5_1: J5.1 R7.2 | length 3507
  Top Layer w10: J5.1 2320,3727.95 2525,3932.95 v1(2525,5254)
  Bottom Layer w10: v1(2525,5254) 2626,5355 3844,5355 4060.42,5138.58 R7.2
NetJ5_2: J5.2 R9.2 | length 3444.8
  Top Layer w10: v1(4556,4578) 4556,5083.28 R9.2
  Bottom Layer w10: J5.2 2223.05,3827.95 2211,3840 2211,4101 2458,4348 4326,4348 v1(4556,4578)
NetJ5_3: J5.3 R13.2 | length 1919
  Bottom Layer w10: J5.3 2482.95,3927.95 2512.91,3957.91 3227.09,3957.91 3290,3895 4000.26,3895 R13.2
NetJ5_4: J5.4 R14.2 | length 1667.5
  Bottom Layer w10: J5.4 3887.28,4027.95 R14.2
NetJ-Power1_2: J-Power1.2 Q10.2 | length 797.5
  Bottom Layer w78.74: Q10.2@6970,8607 7459.14,8607 J-Power1.2
NetJK1_3: JK1.3 KF2.2 | length 1004.7
  Bottom Layer w118.11: JK1.3@6567,4204 6567,3298.35 KF2.2
NetJK1_5: JK1.5 KF2.1 | length 457.2
  Bottom Layer w118.11: JK1.5@6327,3640 6327,3338.35 KF2.1
NetJK2_3: JK2.3 KF3.2 | length 1114.2
  Bottom Layer w10: 5996.06,3228.35 KF3.2
  Bottom Layer w118.11: JK2.3@5794,4192 5794,3659 6043.31,3409.69 KF3.2
NetJK2_5: JK2.5 KF3.1 | length 533.3
  Bottom Layer w118.11: JK2.5@5552,3641 5843.31,3349.69 KF3.1
NetJK3_3: JK3.3 KF4.2 | length 1012.3
  Bottom Layer w118.11: KF4.2 7335,3319.25 JK3.3@7335,4203
NetJK3_5: JK3.5 KF4.1 | length 437.4
  Bottom Layer w118.11: KF4.1 7044.09,3588.09 JK3.5@7099,3643
NetLedTest1_1: LedTest1.1 R8.2 | length 2038.7
  Top Layer w10: LedTest1.1 3822,5746.46 3943,5625.46 3943,4749 4000,4692 4320,4692 4361,4733 4361,5077.26 R8.2
NetLedTest1_2: LedTest1.2 Q_LED_TEST1.C | length 593
  Top Layer w10: LedTest1.2 3960,5846.46 4053,5939.46 Q_LED_TEST1.C@4053,6161.42
NetQ1_B: Q1.B R2.1 | length 841.4
  Top Layer w10: R2.1 5052.68,7717.32 5285.5,7484.5 5285.5,7478.5 Q1.B@5159,7352
NetQ2_B: Q2.B R3.1 | length 479.6
  Top Layer w10: R3.1 4855,7416.84 Q2.B@4855,7362.2
NetQ3_B: Q3.B R4.1 | length 426.8
  Top Layer w10: R4.1 4383.56,7527.44 4544,7367 Q3.B@4554,7367
NetQ4_B: Q4.B R5.1 | length 371.4
  Top Layer w10: R5.1 4212.6,7401.57 Q4.B
NetQ5_B: Q5.B R6.2 | length 1567.6
  Bottom Layer w10: Q5.B 3478.09,3716 4264,3716 4522,3974 4522,4032 4500,4054 4342.99,4054 R6.2
NetQ6_B: Q6.B R7.1 | length 1876.8
  Top Layer w10: R7.1 4318,4829.54 4318,6277.45 Q6.B
NetQ7_B: Q7.B R9.1 | length 1865.8
  Top Layer w10: R9.1 4733,4866.58 4733,6341.14 Q7.B
NetQ8_B: Q8.B R13.1 | length 4502.3
  Top Layer w10: R13.1 4568.26,3137 4920,3137 5042,3259 5042,6298.83 Q8.B
NetQ9_B: Q9.B R14.1 | length 4553.4
  Top Layer w10: v1(5181,3657) 5181,4586 5392,4797 5392,6499 5456,6563 5523.62,6563 Q9.B
  Bottom Layer w10: R14.1 4022.54,3499 5004,3499 5162,3657 v1(5181,3657)
NetQ_LED_TEST1_B: Q_LED_TEST1.B R12.2 | length 2019
  Top Layer w10: v1(5075,5880) 5178.23,5776.77 R12.2
  Bottom Layer w10: Q_LED_TEST1.B 4222.11,5896 5059,5896 v1(5075,5880)
NetR2_2: R2.2 Y1.5 | length 692.8
  Top Layer w10: Y1.5 4429.13,8659.87 4725.47,8363.53 R2.2
NetR3_2: R3.2 Y1.4 | length 663.4
  Top Layer w10: Y1.4 4554.51,8455.72 R3.2
NetR4_2: R4.2 Y1.3 | length 634
  Top Layer w10: Y1.3 4383.56,8526.68 R4.2
NetR5_2: R5.2 Y1.2 | length 604.6
  Top Layer w10: Y1.2 4129.13,8194.49 R5.2
NetR6_1: R6.1 U1.40 | length 5120.6
  Top Layer w10: U1.40 3625,8195.87 3625,4368 4285.84,3707.16 R6.1
NetR12_1: R12.1 U1.19 | length 3334.3
  Bottom Layer w10: U1.19 3337.25,6033.61 3337.25,5997.92 4126.47,5208.7 5008.3,5208.7 5178.23,5038.77 R12.1
P0BUS0: J0.1 R20.1 U1.1 | length 5180.5
  Top Layer w10: U1.1 3166,8004.87 3166,6259 3160,6265 v1(3160,6272)
  Bottom Layer w10: J0.1 2603.15,8567.72 U1.1 ; v1(3160,6272) 3173,6272 3668,5777 3668,5704 5001.43,5704 R20.1
P0BUS1: J0.2 R21.1 U1.2 | length 10405.2
  Top Layer w10: U1.2 2753,8233.31 2753,7048 2780,7021 2840,7021 2929.88,6931.12 2929.88,4046.12 3244,3732 3244,3162 3297,3109 4993,3109 5082,3198 5082,4842 5333.7,5093.7 R21.1
  Bottom Layer w10: J0.2 2603.15,8467.72 U1.2
P0BUS2: J0.3 R26.1 U1.3 | length 6122.5
  Top Layer w10: U1.3 3000,7970.87 v1(3000,6500)
  Bottom Layer w10: J0.3 2603.15,8367.72 U1.3 ; v1(3000,6500) 3319,6181 3548,6181 3900,5829 4903,5829 5036,5696 6264.96,5696 R26.1
P0BUS3: J0.4 R28.1 U1.4 | length 3984.9
  Bottom Layer w10: J0.4 2603.15,8267.72 U1.4 3044.87,7826 5502.62,7826 R28.1
P0BUS4: J0.5 U1.5 | length 630.8
  Bottom Layer w10: J0.5 2603.15,8167.72 U1.5
P0BUS5: J0.6 U1.6 | length 630.8
  Bottom Layer w10: J0.6 2409.28,8067.72 2601.41,7875.59 U1.6
P0BUS6: J0.7 U1.7 | length 630.8
  Bottom Layer w10: J0.7 2306.28,7967.72 2498.41,7775.59 U1.7
P0BUS7: J0.8 U1.8 | length 630.8
  Bottom Layer w10: J0.8 2375.28,7867.72 2567.41,7675.59 U1.8
P1BUS0: J1.1 SP3.3 U1.9 | length 5667.4
  Top Layer w10: v1(3376,7296) 3373,7296 3355.53,7278.53 3355.53,6585.84 3403,6538.37 3403,4032 4074.8,3360.2 SP3.3
  Bottom Layer w10: J1.1 2620.45,7400.77 U1.9 3087.87,7283 3100.87,7296 v1(3376,7296)
P1BUS1: J1.2 SP3.2 U1.10 | length 6553.3
  Bottom Layer w10: U1.10 2620.45,7300.77 J1.2 2140.23,7300.77 2140.23,7013.51 2093,6966.28 2093,3652 2610,3135 3861,3135 SP3.2@3985,3259
P1BUS2: J1.3 U1.11 | length 623.6
  Bottom Layer w10: J1.3 2258.46,7200.77 2304.7,7247 2666.69,7247 U1.11
P1BUS3: J1.4 U1.12 | length 643.1
  Bottom Layer w10: J1.4 2244.09,7134 2322.09,7212 2731.69,7212 U1.12
P1BUS4: J1.5 U1.13 | length 623.6
  Bottom Layer w10: J1.5 2389.77,7000.77 2527,7138 2757.69,7138 U1.13
P1BUS5: J1.6 U1.14 | length 623.6
  Bottom Layer w10: J1.6 2494.77,6900.77 2669.59,7075.59 U1.14
P1BUS6: J1.7 SP1.3 U1.15 | length 4380.4
  Top Layer w10: U1.15 2847,6923.87 2847,3951 2913.39,3884.61 SP1.3
  Bottom Layer w10: J1.7 2499.77,6800.77 2674.59,6975.59 U1.15
P1BUS7: J1.8 SP1.2 U1.16 | length 4290.6
  Top Layer w10: U1.16 2750,6830.31 2750,4213 2733,4196 2733,3500 2813.39,3419.61 SP1.2
  Bottom Layer w10: J1.8 2500.77,6700.77 2675.59,6875.59 U1.16
P2BUS0: J2.1 Q1.C U1.32 | length 5153
  Top Layer w10: J2.1 2290,5571.67 2303,5584.67 2310.28,6640.49 v1(2310.28,7620)
  Bottom Layer w10: v1(2310.28,7620) 3400.87,7620 U1.32 4971.41,7575.59 5033,7514 5116,7514 Q1.C@5267,7363
P2BUS1: J2.2 Q2.C U1.33 | length 4676.8
  Top Layer w10: v1(3199,6034) 3232,6067 3232,7462.31 U1.33 ; Q2.C@4956,7360.05 v1(4956,7643)
  Bottom Layer w10: J2.2 2319.67,5671.67 2682,6034 v1(3199,6034) ; U1.33 3514.1,7606.77 4841.92,7606.77 4880.15,7645 v1(4956,7643)
P2BUS2: J2.3 Q3.C U1.34 | length 4688.7
  Top Layer w10: v1(3115,5974) 3115,6013 3202,6100 3202,7532.31 U1.34 ; v1(4463,7645) 4560,7645 4596.71,7608.29 4596.71,7396.29 4644,7349 Q3.C@4661,7349
  Bottom Layer w10: J2.3 2216.67,5771.67 2205,5760 2205,5640 2216,5629 2731,5629 3076,5974 v1(3115,5974) ; U1.34 3578.87,7642 3581.87,7645 v1(4463,7645)
P2BUS3: J2.4 Q4.C U1.35 | length 5029.2
  Top Layer w10: U1.35 3512,7808.87 3505.02,7801.89 3505.02,7328.02 v1(3502,7325)
  Bottom Layer w10: J2.4 2205,5871.67 2125,5951.67 2125,6973 2196,7044 2378,7044 2407.5,7073.5 2408.5,7073.5 2466.5,7131.5 2466.5,7132.5 2496,7162 2716,7162 2772,7218 4157.76,7218 4326.17,7285.75 Q4.C@4351,7344 ; v1(3502,7325) 3521.28,7325 3549.5,7296.79 4281.56,7289.79 Q4.C@4346.97,7355.2
P2BUS4: J2.5 U1.36 | length 3265.3
  Top Layer w10: v1(3297,6017) 3297,7299.28 3430.72,7433 3471,7433 3487.15,7449.15 3487.15,7800.31 3470,7817.46 3425.54,7817.46 3403,7840 3403,7933.31 U1.36
  Bottom Layer w10: J2.5 2253.93,6001.93 2325,6073 3241,6073 v1(3297,6017)
P2BUS5: J2.6 U1.37 | length 3435.6
  Top Layer w10: v1(2606,6456.07) 2606,8348 2680,8422 3098.87,8422 U1.37
  Bottom Layer w10: J2.6 2253.93,6104 v1(2606,6456.07)
P2BUS6: J2.7 U1.38 | length 3528.6
  Top Layer w10: J2.7 2253.93,6215.07 2240,6229 2216.62,6229 2205.62,6240 2205.62,6314 2281,6389.38 2281,6658 2292.4,6669.4 2292.4,7044 2285.4,7051 2220,7051 2195,7076 2195,7720 2578,8103 2578,8400 2618,8440 3180.87,8440 U1.38
P2BUS7: J2.8 U1.39 | length 3189.1
  Top Layer w10: v1(3391,6625) 3391,7189 3427,7225 3530,7225 3545,7240 3545,8175.87 U1.39
  Bottom Layer w10: J2.8 2328.67,6271.67 2774.46,6717.46 3316.54,6717.46 3394,6640 3391,6637 v1(3391,6625)
P3BUS0: J3.1 SP2.3 U1.21 | length 4511.8
  Top Layer w10: v1(3367,6458) 3367,4407.72 v1(3370,4404.72) 3370,4002.51 3581,3791.51 3581,3343.2 SP2.3
  Bottom Layer w10: J3.1 v1(3370,4404.72) ; v1(3367,6458) 3386,6458 3403.59,6475.59 U1.21
P3BUS1: J3.2 SP2.2 U1.22 | length 5744.4
  Top Layer w10: U1.22 3488,6532.87 3488,4564 v1(3464,4540)
  Bottom Layer w10: SP2.2 3405.51,3370.49 3253,3523 2293,3523 2125,3691 2125,4440.61 2253.93,4466 J3.2 2253.93,4540 v1(3464,4540)
P3BUS2: J3.3 Q6.C U1.23 | length 4586.4
  Top Layer w10: J3.3 2300,4604.72 2328,4632.72 2328,6473 v1(2573,6718)
  Bottom Layer w10: v1(2573,6718) 2672.46,6817.46 3303.4,6817.46 U1.23 4134.96,6675.59 4410.55,6400 4490.55,6400 4510.55,6420 4584,6420 Q6.C@4641,6477
P3BUS3: J3.4 Q7.C U1.24 | length 5091.8
  Top Layer w10: U1.24 3521,6699.87 v1(3521,4729)
  Bottom Layer w10: J3.4 3496.72,4704.72 v1(3521,4729) ; U1.24 4836.41,6775.59 4986,6626 Q7.C@4986,6492
P3BUS4: J3.5 U1.25 | length 3518.4
  Top Layer w10: v1(2158,6826) 2158,4846.72 2200,4804.72 J3.5
  Bottom Layer w10: v1(2158,6826) 2182,6850 2499,6850 2649,7000 2752,7000 2770,7018 3302.87,7018 U1.25
P3BUS5: J3.6 U1.26 | length 3485.4
  Top Layer w10: v1(2191,6951) 2191,6335.21 2187.74,6331.95 2187.74,4923.26 2206.28,4904.72 J3.6
  Bottom Layer w10: v1(2191,6951) 2417,6951 2584,7118 3302.87,7118 U1.26
P3BUS6: J3.7 Q8.C U1.27 | length 5403.7
  Top Layer w10: U1.27 3554,6966.87 v1(3554,5317)
  Bottom Layer w10: J3.7 2332.72,5004.72 2645,5317 v1(3554,5317) ; U1.27 4852.41,7075.59 5340,6588 Q8.C@5340,6514
P3BUS7: J3.8 Q9.C U1.28 | length 6136
  Top Layer w10: U1.28 3587,7033.87 v1(3587,5471)
  Bottom Layer w10: J3.8 2326.72,5104.72 3062,5840 3218,5840 v1(3587,5471) ; U1.28 5100.41,7175.59 5692,6584 5692,6502 Q9.C@5686,6496
VCC: C2.1 F1.2 F2.2 J6.2 J7.1 J-Power2.1 J-Power3.1 J-Power4.1 Q10.1 TVCC1.1 | length 7404.5
  Top Layer w10: v2(6062.99,6259.84) J7.1
  Top Layer w78.74: v2(7503,6264) 7503,5978 TVCC1.1@7731,5750
  Bottom Layer w10: v2(6062.99,6259.84) 6653.54,6259.84 6811.02,6417.32 J6.2@6968.5,6417.32 ; C2.1@6810,5690 6810,5865.12 6920.2,5975.32 6920.2,6351 6945.45,6376.26 6968.5,6376.26 J6.2 7451.57,6427.95 7502,6478.38
  Bottom Layer w78.74: F2.2 6730.24,7880 F1.2@7011,7880 ; Q10.1 6968.5,7919.5 F1.2@7006,7882 ; F1.2 7214.83,7671 J-Power2.1@7671,7671 ; v2(7503,6264) 7502,6264 7502,6478.38 J-Power4.1 ; J-Power2.1@7675,7671 J-Power2.1@7671,7671 ; J-Power3.1 J-Power3.1@7663.81,7152 ; J-Power2.1 J-Power2.1@7671,7671 ; J-Power4.1@7682,6655 7407.19,6655 7287,6775.19 J-Power3.1@7663.81,7152 ; J-Power3.1@7686,7152 J-Power3.1@7663.81,7152 ; J-Power3.1@7663.81,7152 7516,7152 7334,7334 J-Power2.1@7671,7671
VCC5_LM7805: C4.1 D1.1 J7.2 V1.3 | length 2999.5
  Top Layer w10: D1.1 6918.5,6627 7139,6406.5 C4.1@7139,6063
  Bottom Layer w10: J7.2 6776.05,6553.54 6918.5,6696 D1.1 ; C4.1 7689.15,5490 7747,5490 ; V1.3 7748,5225.16 7748,5490.19
VCC_S: D5.1 J7.3 JK1.2 JK2.2 JK3.2 R1.1 R8.1 R10.1 R11.1 R16.2 R17.2 R18.2 R19.2 R24.2 R25.2 TUVCC1.1 U1.18 U2.2 Y1.6 | length 14675.8
  Top Layer w10: U2.2 2955.76,5832.09 2947.76,5840.09 2947.76,6384.35 3092,6528.59 v1(3092,6639) ; R17.2 4393,5942.21 4393,5337 4475,5255 4475,4797.56 R8.1 4422.32,4422 4598,4246.32 4598,3731.58 R1.1 4469.57,3483.19 TUVCC1.1 ; Y1.6 4529.13,8620.47 D5.1 6062.99,7086.62 J7.3 6146.73,6569.8 R25.2 ; JK2.2 5559.56,4142.56 5742,4325 6134,4325 JK1.2@6333.23,4125.77 ; JK1.2 6636.09,3814 6809,3814 JK3.2@7103,4108
  Bottom Layer w10: U1.18 3063,6675.59 3092,6646.59 v1(3092,6639) 3099.59,6639 3330.44,6408.15 3921.85,6408.15 4226.22,6103.78 R16.2 R17.2 R18.2 R19.2 4938.65,5943 5184,5943 5312,5815 5753.8,5815 R24.2 R25.2 ; R8.1 4479.2,4688 4743.39,4688 R10.1 R11.1 4989.25,4683.75 JK2.2@5556,4117
pads on no net: JK1.4 JK2.4 JK3.4 U1.17 U1.29 U2.1 U2.3 U2.4 Y1.1

## Keep-outs
Keep-Out Layer:
  lines w11.81: 2051.18,3051.18 2051.18,8854.33 7854.33,8854.33 7854.33,3051.18 2051.18,3051.18

## Text inside footprints (layer, text, board x,y; h text height)
BUZ1: Top Overlay "+" at 2573.7,3857.95 h60
C1: Top Overlay "+" at 3677.64,4903.15 h98.43
C2: Top Overlay "+" at 6679.61,5769.29 h98.43
C3: Top Overlay "+" at 7110.57,5616 h98.43
C4: Top Overlay "+" at 7011.57,6146 h98.43
D1: Top Overlay "+" at 6848.5,6851.65 h39.37
D2: Top Overlay "+" at 5742.09,4607.24 h39.37
D3: Top Overlay "+" at 6371.22,4607.24 h39.37
D4: Top Overlay "+" at 7000.35,4607.24 h39.37
J0: Top Overlay "1" at 2354.33,8579.92 h35.43 r270; Top Overlay "8" at 2354.33,7879.13 h35.43 r270
J1: Top Overlay "1" at 2354.33,7412.97 h35.43 r270; Top Overlay "8" at 2354.33,6712.18 h35.43 r270
J2: Top Overlay "1" at 2143.69,5559.47 h35.43 r90; Top Overlay "8" at 2143.69,6260.26 h35.43 r90
J3: Top Overlay "1" at 2143.69,4392.52 h35.43 r90; Top Overlay "8" at 2143.69,5093.31 h35.43 r90
J5: Top Overlay "1" at 2153.54,3724.41 h35.43 r90; Top Overlay "4" at 2157.48,4015.75 h35.43 r90
LedTest1: Top Overlay "+" at 3660.47,5681.46 h39.37 r90
Q1: Top Overlay "C" at 5206,7392 h30; Top Overlay "B" at 5153,7416 h30; Top Overlay "E" at 5100,7392 h30
Q2: Top Overlay "C" at 4903.66,7393.2 h30; Top Overlay "B" at 4850.66,7417.2 h30; Top Overlay "E" at 4797.66,7393.2 h30
Q3: Top Overlay "C" at 4601.31,7393.2 h30; Top Overlay "B" at 4548.31,7417.2 h30; Top Overlay "E" at 4495.31,7393.2 h30
Q4: Top Overlay "C" at 4298.97,7393.2 h30; Top Overlay "B" at 4245.97,7417.2 h30; Top Overlay "E" at 4192.97,7393.2 h30
Q5: Top Overlay "C" at 3461.57,3810.53 h30; Top Overlay "B" at 3408.57,3834.53 h30; Top Overlay "E" at 3355.57,3810.53 h30
Q6: Top Overlay "C" at 4583.61,6527.06 h30; Top Overlay "B" at 4530.61,6551.06 h30; Top Overlay "E" at 4477.61,6527.06 h30
Q7: Top Overlay "C" at 4934.93,6527.06 h30; Top Overlay "B" at 4881.93,6551.06 h30; Top Overlay "E" at 4828.93,6527.06 h30
Q8: Top Overlay "C" at 5286.24,6527.06 h30; Top Overlay "B" at 5233.24,6551.06 h30; Top Overlay "E" at 5180.24,6527.06 h30
Q9: Top Overlay "C" at 5637.55,6527.06 h30; Top Overlay "B" at 5584.55,6551.06 h30; Top Overlay "E" at 5531.55,6527.06 h30
Q11: Top Overlay "C" at 5919.77,5031 h30; Top Overlay "B" at 5866.77,5055 h30; Top Overlay "E" at 5813.77,5031 h30
Q12: Top Overlay "C" at 6238,5031 h30; Top Overlay "B" at 6185,5055 h30; Top Overlay "E" at 6132,5031 h30
Q13: Top Overlay "C" at 7192.67,4952.26 h30; Top Overlay "B" at 7139.67,4976.26 h30; Top Overlay "E" at 7086.67,4952.26 h30
Q_LED_TEST1: Top Overlay "C" at 4003.69,6192.42 h30; Top Overlay "B" at 3950.69,6216.42 h30; Top Overlay "E" at 3897.69,6192.42 h30
SP1: Top Overlay "3" at 2907.87,3385.83 h35.43; Top Overlay "1" at 2695.28,3377.95 h35.43
SP2: Top Overlay "3" at 3500,3385.83 h35.43; Top Overlay "1" at 3287.4,3377.95 h35.43
SP3: Top Overlay "3" at 4069.29,3385.83 h35.43; Top Overlay "1" at 3856.69,3377.95 h35.43
Y1: Top Overlay "7" at 4631.13,8738.1 h60; Top Overlay "1" at 4020.13,8741.1 h60